# Altium PCB OT_LoRaWAN_Kit_02.PcbDoc
Units mm, origin at the board's own origin, x right, y up, seen from the top; angles counter-clockwise.
Board outline 53.4 x 48.3 mm, 2 copper layers (Top Layer, Bottom Layer); 41 components, 40 nets, 138 pads, 103 vias.
Unrouted connection lines stored in the file: 2.
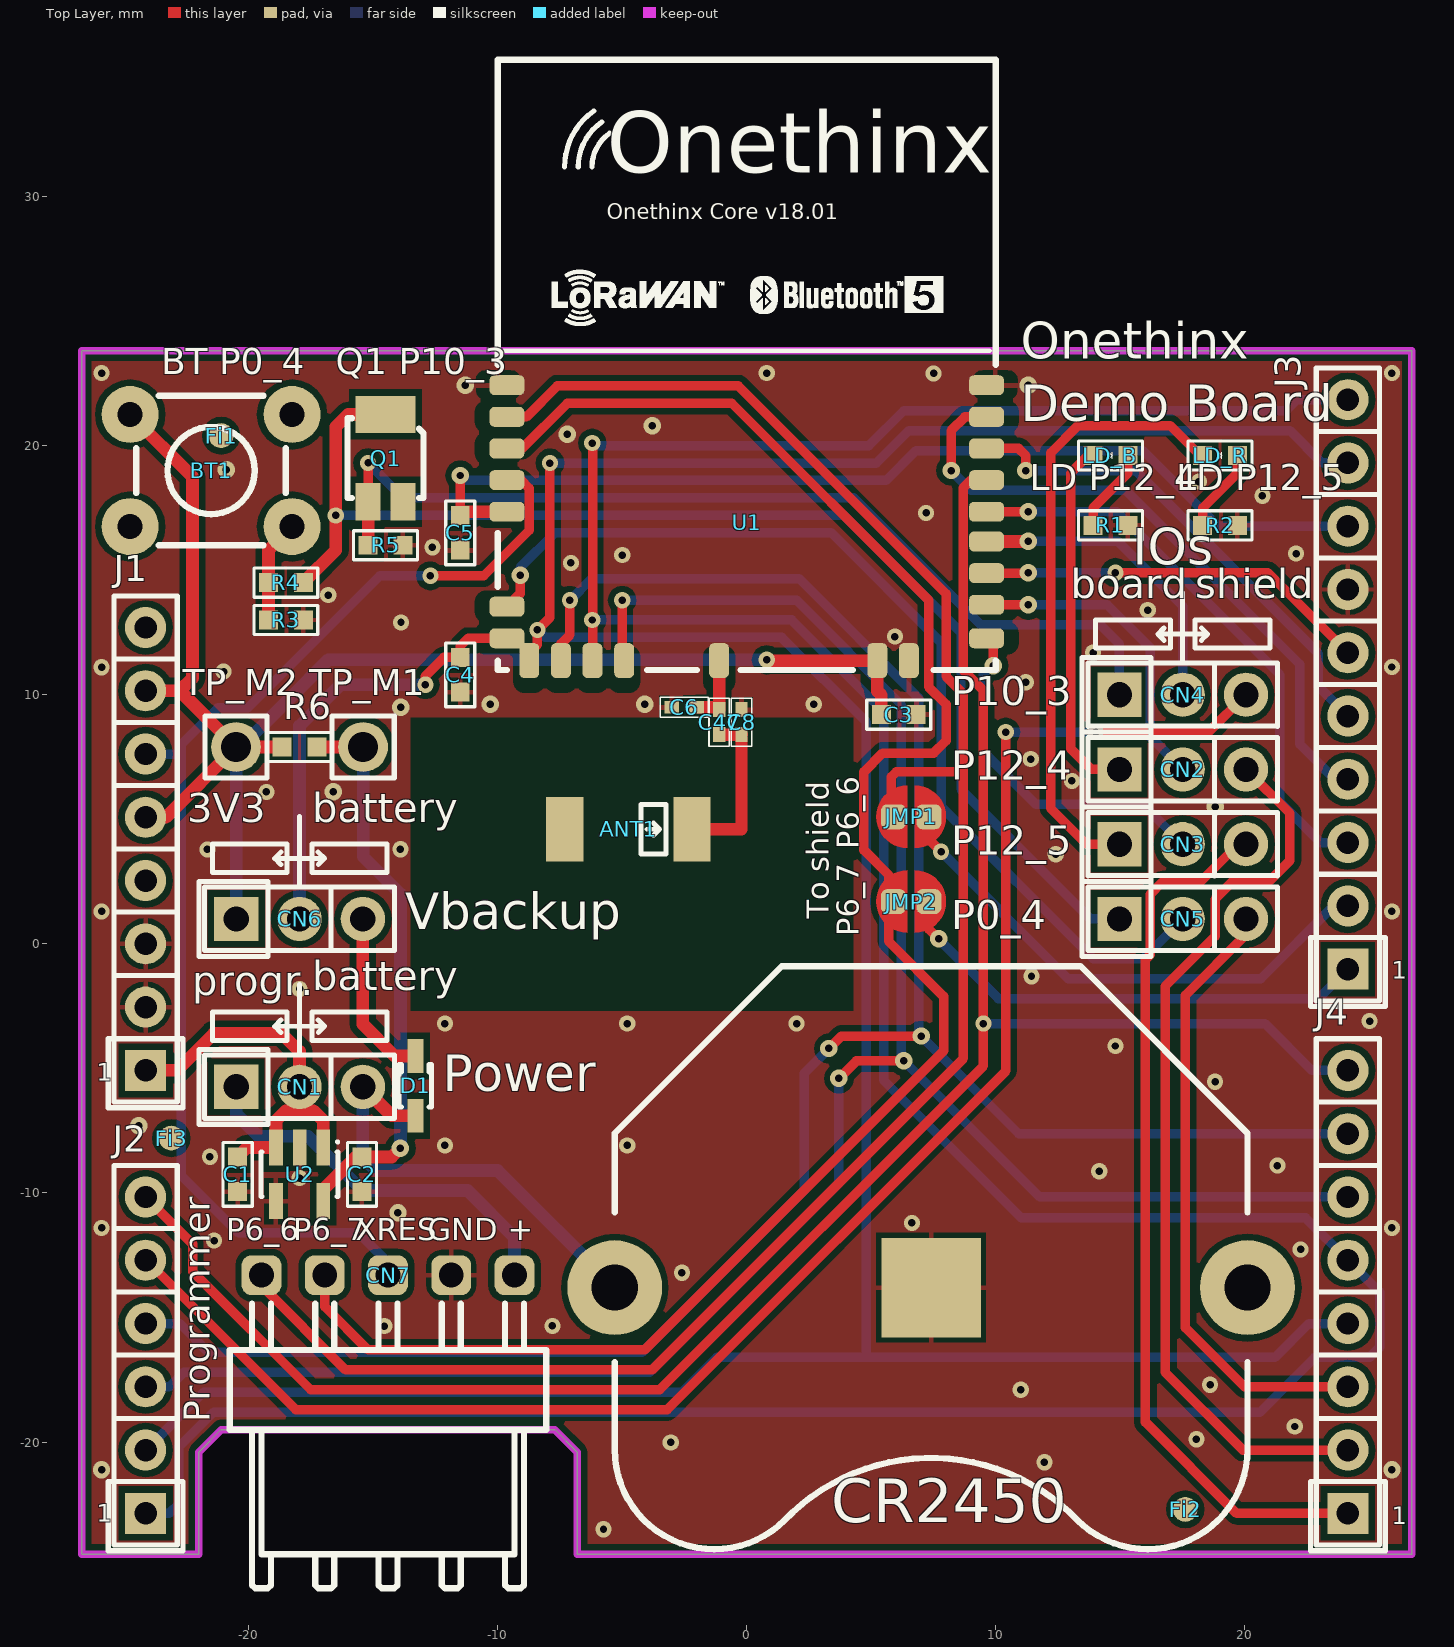
[diagram p0: Top Layer view]
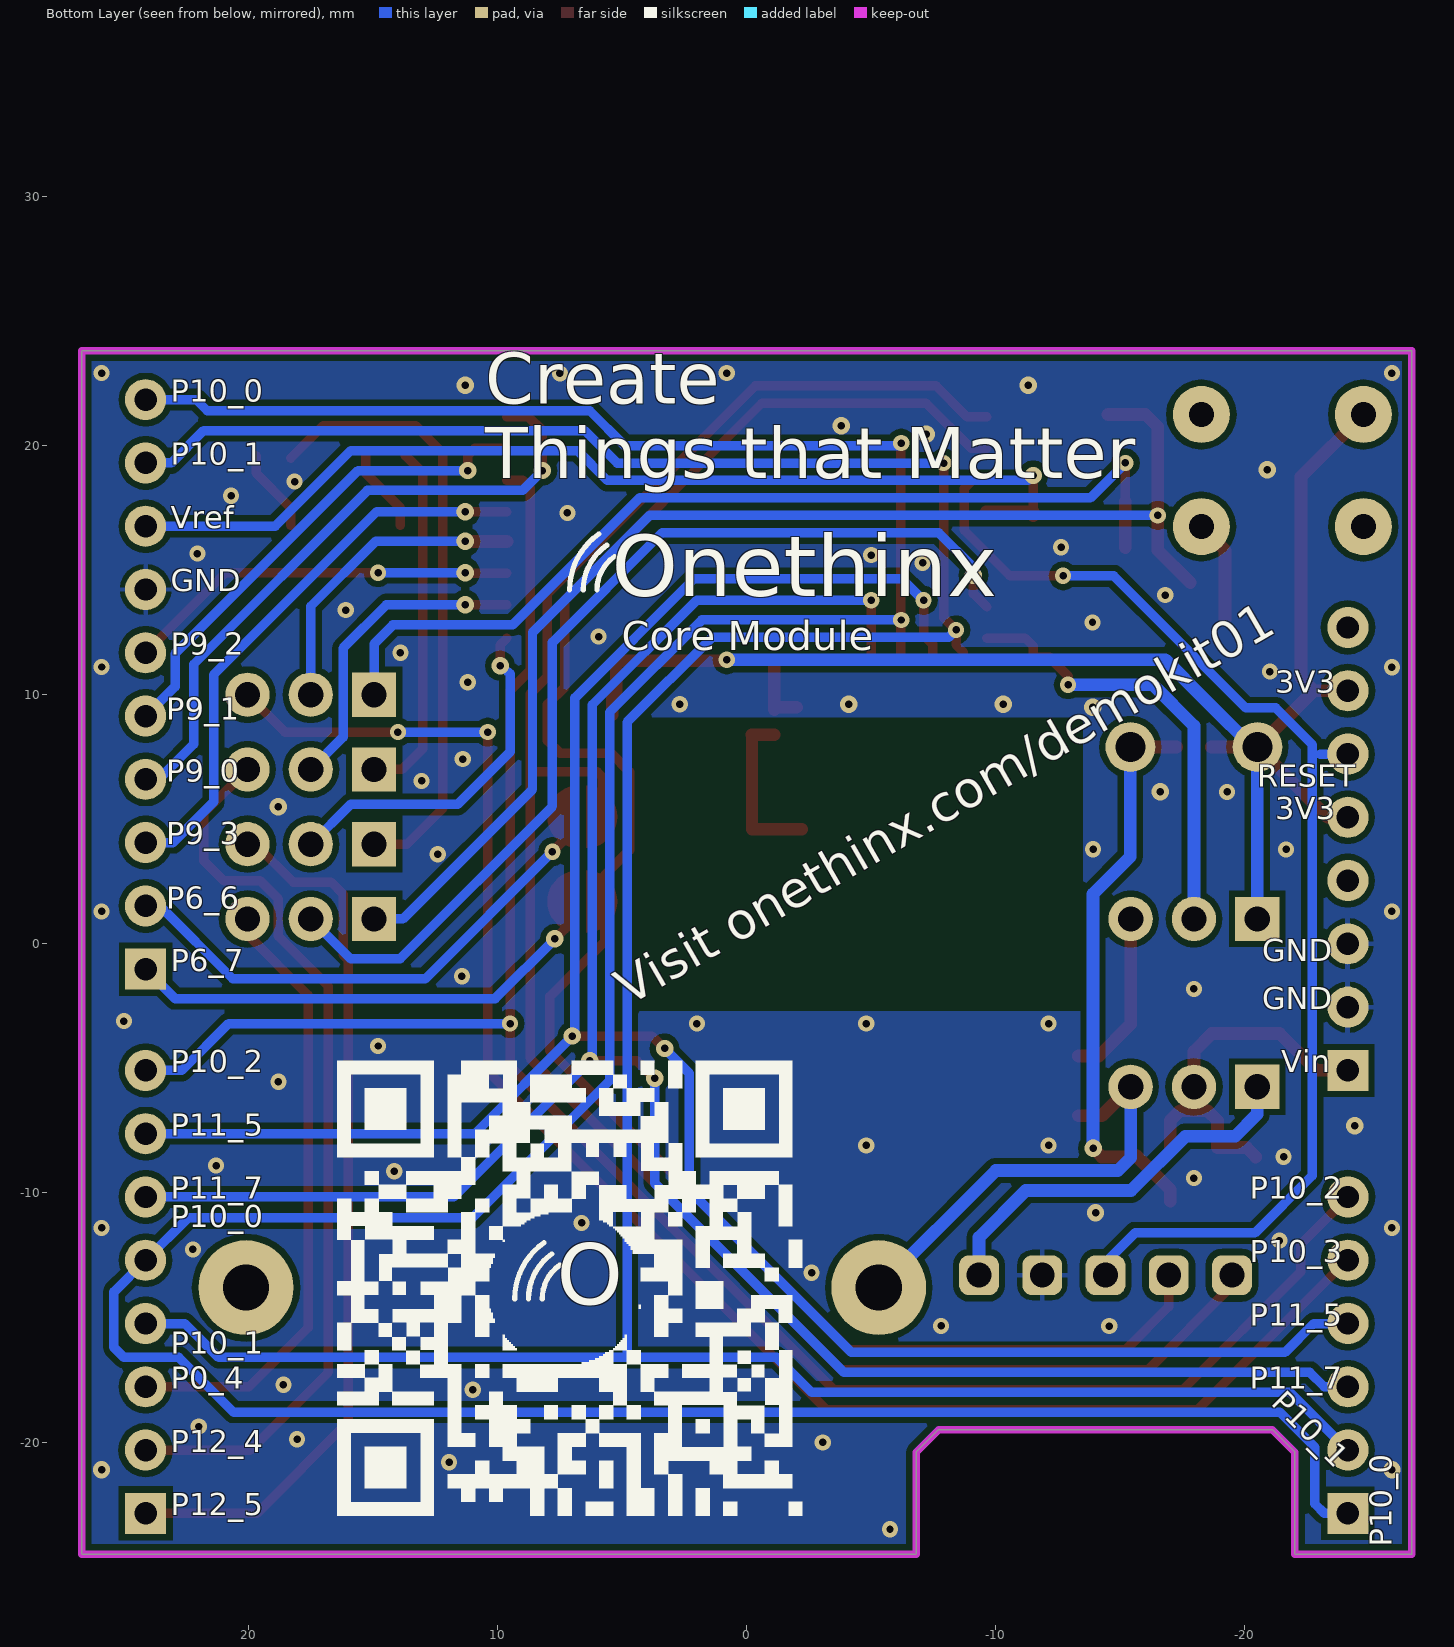
[diagram p1: Bottom Layer view, seen from below]

## Layer stack, top to bottom
Top Solder: solder mask 0.0102, Solder Resist, Dk 3.5
Top Layer: signal copper 0.0356
Dielectric 1: dielectric 0.32, FR-4, Dk 4.8
Bottom Layer: signal copper 0.0356
Bottom Solder: solder mask 0.0102, Solder Resist, Dk 3.5

## Board outline
-26.7,-24.5 -26.7,23.8 26.7,23.8 26.7,-24.5 -6.8,-24.5 -6.8,-20.4 -7.7,-19.5 -21.1,-19.5 -22,-20.4 -22,-24.5

## Design rules (kind name [scope] priority, off if disabled: settings)
BoardOutlineClearance [All] p1 off: gap=0.25 ignorepadtopadclearanceinfootprint=FALSE except(0: Arc-SplitContinuation Track-SplitContinuation SMDPad-SplitContinuation THPad-SplitContinuation Via-SplitContinuation Fill-SplitContinuation Poly-SplitContinuation Region-SplitContinuation Text-SplitContinuation)
Clearance [IsRegion] p1: gap=0.254 ignorepadtopadclearanceinfootprint=FALSE except(0: Arc-Hole Track-Hole SMDPad-Hole THPad-Hole Via-Hole Fill-Hole Poly-Hole Region-Hole Text-Hole)
Clearance Clearance-xPP-xTP-xTT [All] p2: gap=0.15 ignorepadtopadclearanceinfootprint=FALSE except(0: Arc-Hole Track-Hole SMDPad-Hole THPad-Hole Via-Hole Fill-Hole Poly-Hole Region-Hole Text-Hole)
ComponentClearance [All] p1 off: gap=0.25 collisioncheckmode=3 verticalgap=0.25 showdistances=FALSE
DiffPairsRouting [All] p1: maxlimit=0.25 minlimit=0.25 mostfreqgap=0.25 toplayer_minwidth=0.381 toplayer_maxwidth=0.381 toplayer_prefwidth=0.381 bottomlayer_minwidth=0.381 bottomlayer_maxwidth=0.381 bottomlayer_prefwidth=0.381 maxuncoupledlength=12.5
Height [All] p1: minheight=0 maxheight=25 prefheight=12.5
HoleSize HoleSize-PTH [All] p1: absolutevalues=TRUE maxlimit=2 minlimit=0.25 maxpercent=80.000 minpercent=20.000
HoleToHoleClearance [All] p1: gap=0.35 allowstackedmicrovias=TRUE
MinimumAnnularRing "Minimum IAR  >0.45mm" [((ObjectKind = 'Pad') OR (ObjectKind = 'Via')) And (Layer = 'MultiLayer') And (HoleDiameter > AsMM(0.45))] p1: minimumring=0.175 // minimum inner annular ring for pads > 0.45mm finished hole size
MinimumAnnularRing "Minimum IAR <=0.45mm" [((ObjectKind = 'Pad') OR (ObjectKind = 'Via')) And (Layer = 'MultiLayer') And (HoleDiameter <= AsMM(0.45))] p2: minimumring=0.175 // minimum inner annular ring for pads <= 0.45mm finished hole size
MinimumSolderMaskSliver [All] p1: minsoldermaskwidth=0.08
PlaneClearance PlaneClearance-IPI [All] p1: clearance=0.25
PlaneConnect [All] p1: planeconnectstyle=Relief reliefexpansion=0.175 reliefentries=4 reliefconductorwidth=0.2 reliefairgap=0.2
PolygonConnect [ISVIA OR InComponent('NT1')] p1: connectstyle=Direct reliefconductorwidth=0.254 reliefentries=4 polygonreliefangle="90 Angle" airgapwidth=0.254
PolygonConnect PolygonConnect-xTW [All] p2: connectstyle=Relief reliefconductorwidth=0.2 reliefentries=4 polygonreliefangle="90 Angle" airgapwidth=0.2
RoomDefinition OT_LoRaWAN_Kit_02 [InComponentClass('OT_LoRaWAN_Kit_02')] p1: confinementstyle=ConfineOut formatcopy=TRUE lockcomponents=FALSE outline 39,-23 45.5,-23 45.5,-17 39,-17
RoutingCorners [All] p1: cornerstyle=45-Degree minsetback=2.5 maxsetback=2.5
RoutingVias [All] p1: holewidth=0.3 width=0.65 viastyle="Through Hole" minholewidth=0.25 minwidth=0.6 maxholewidth=0.9 maxwidth=1.25
RoutingVias "RoutingVias > 0.45mm" [(ObjectKind = 'Via') And (HoleDiameter > AsMM(0.45))] p2 off: holewidth=0.5 width=0.85 viastyle="Through Hole" minholewidth=0.5 minwidth=0.85 maxholewidth=0.9 maxwidth=1.25 // finishet hole size > 0.45mm
RoutingVias "RoutingVias <= 0.45mm" [(ObjectKind = 'Via') And (HoleDiameter <= AsMM(0.45))] p3 off: holewidth=0.3 width=0.65 viastyle="Through Hole" minholewidth=0.25 minwidth=0.6 maxholewidth=0.45 maxwidth=0.8 // finishet hole size <= 0.45mm
SilkToSilkClearance [All] p1 off: silktosilkclearance=0.2
SilkToSolderMaskClearance SilkscreenOverComponentPads [IsPad] p1 off: minsilkscreentomaskgap=0.2 clearancetoexposedcopper=TRUE
SolderMaskExpansion [All] p1: expansion=0
Width Width-xTW [All] p1: maxlimit=1.5 minlimit=0.15 preferedwidth=0.2
19 further rules are at their usual default settings.

## Components (designator, comment, footprint, x,y, rotation, side; value= is the part's Value field where it differs from the comment)
ANT1 "ANT" "ANT FR05-S1-N-0-102" -4.75,4.6 r180 top
BT1 "BT P0_4" "BUTTON TACT6x6" -21.5,19 r90 top
C1 "1uF" 0603C-GENERIC -20.435,-9.25 r90 top
C2 "1uF" 0603C-GENERIC -15.448,-9.25 r90 top
C3 "100nF" 0603C-GENERIC 6.1,9.2 r180 top
C4 "100nF" 0603C-GENERIC -11.5,10.8 r90 top
C5 "100nF" 0603C-GENERIC -11.5,16.5 r90 top
C6 "1pF" 0402C-SMALL -2.51,9.5 r180 top
C8 "dnp" 0402C-SMALL -0.21,8.9 r90 top
C47 "1.5pF" 0402C-SMALL -1.11,8.9 r270 top
CN1 "CONNECTOR 1x3" HEADER-1X3 -20.49,-5.734 r90 top
CN2 "CONNECTOR 1x3" HEADER-1X3 14.96,7.006 r90 top
CN3 "CONNECTOR 1x3" HEADER-1X3 14.96,4.006 r90 top
CN4 "CONNECTOR 1x3" HEADER-1X3 14.96,10.006 r90 top
CN5 "CONNECTOR 1x3" HEADER-1X3 14.96,1.006 r90 top
CN6 "CONNECTOR 1x3" HEADER-1X3 -20.49,1.006 r90 top
CN7 "Programmer" "CON Molex 22053051" -14.4,-13.3 r0 top
CR2450 "BAT" "BATT_2450 clip - TH" 7.4,-13.8 r180 top locked
D1 "BAS16HT1G" SOD323 -13.3,-5.7 r90 top
Fi1 "FiducialTop" FiducialTop -21.1,20.4 r90 top
Fi2 "FiducialTop" FiducialTop 17.6,-22.7 r90 top
Fi3 "FiducialTop" FiducialTop -23.1,-7.8 r90 top
J1 "CONNECTOR 1x8" "SOCKET 2.54 1X8 TH" -24.13,-5.08 r180 top
J2 "CONNECTOR 1x6" "SOCKET 2.54 1X6 TH" -24.13,-22.86 r180 top
J3 "CONNECTOR 1x10" "SOCKET 2.54 1X10 TH" 24.13,-1.016 r180 top
J4 "CONNECTOR 1x8" "SOCKET 2.54 1X8 TH" 24.13,-22.86 r180 top
JMP1 "SWD to shield" "SOLDER JUMPER" 6.6,5.1 r180 top
JMP2 "SWD to shield" "SOLDER JUMPER" 6.6,1.7 r180 top
LD_B "LD P12_4" "LED SMD 0603 (1608)" 14.6,19.6 r180 top
LD_R "LD P12_5" "LED SMD 0603 (1608)" 19,19.6 r180 top
Q1 "Q1 P10_3" PLCC-3_CEB -14.5,19.5 r90 top
R1 "15K" 0603R-GENERIC 14.6,16.8 r180 top
R2 "10K" 0603R-GENERIC 19,16.8 r180 top
R3 "1M" 0603R-GENERIC -18.5,13 r180 top
R4 "1K" 0603R-GENERIC -18.5,14.5 r0 top
R5 "47K" 0603R-GENERIC -14.5,16 r180 top
R6 "0R" 0603R-GENERIC -17.95,7.9 r0 top
TP_M1 "TestPoint" "TestPoint 2mm" -15.4,7.9 r90 top
TP_M2 "TestPoint" "TestPoint 2mm" -20.5,7.9 r90 top
U1 "Onethinx Core V18.01" OnethinxCore_18_01 0,23.495 r0 top
U2 "TPS78330DDC" SOT-23-5 -17.948,-9.25 r180 top

## Footprints (in the part's own frame and the unit in brackets; to place one, negate y for a bottom-side part, rotate by r counter-clockwise, add the part's x,y. Pads: shape width x height; smd on the part's side, far side on the other; paste and mask are expansions set on the pad)
0402C-SMALL [mm] "CAPACITOR 0402 Small Land Pattern"
  rect 0.6x0.5 smd: 1(-0.5,0) 2(0.5,0)
  silkscreen extent -0.97,-0.41 0.97,0.41, body extent -0.51,-0.25 0.51,0.25, height 0.33
0603C-GENERIC [mil] "CAPACITOR 0603"
  rect 30x30 smd: 1(-27.56,0) 2(27.44,0)
  silkscreen extent -51,-23 50,23, body extent -32,-15 31,15, height 19
0603R-GENERIC [mil] "RESISTOR 0603"
  rect 30x30 smd: 1(-27.5,0) 2(27.5,0)
  silkscreen extent -50,-23 50,23, body extent -32,-15 32,15, height 19
"ANT FR05-S1-N-0-102" [mm] "Fractus FR05-S1-N-0-102 Compact Reach XtendTM (2.4 – 2.5 GHz)"
  rect 1.5x2.6 smd: ANT(-2.55,0) NC(2.55,0)
  silkscreen extent -1.5,-1 -0.5,1, body extent -3.5,-1.5 3.5,1.5, height 2.01
"BATT_2450 clip - TH" [mm] "Battery CR2450 clip"
  rect 4x4 smd paste+0: MINUS(0,0)
  round 3.81 hole 1.85: PLUS(-12.7,0) PLUS_1(12.7,0)
  silkscreen extent -12.7,-12.9 12.7,10.5
"BUTTON TACT6x6" [mm]
  round 2.286 hole 1: 1(-2.25,3.25) 2(2.25,3.25) 3(-2.25,-3.25) 4(2.25,-3.25)
  silkscreen extent -3,-3 3,3, body extent -3,-3.85 3,3.85, height 9.5
"CON Molex 22053051" [mm] "5 way 2.54mm RA TH"
  rrect50% 1.6x1.6 hole 1: 1(-5.08,0) 2(-2.54,0) 3(0,0) 4(2.54,0) 5(5.08,0)
  silkscreen extent -6.35,-12.57 6.35,-1.14
FiducialTop [mm]
  round 1 / inner round 0 / far side round 0 all layers, no hole: A(0,0)
HEADER-1X3 [mil]
  rect 70x70 hole 40: 1(-0.25,0)
  round 70 hole 40: 2(-0.25,-100) 3(-0.25,-200)
  silkscreen extent -59,-250 59,59, body extent -50,-250 50,50, height 354
"LED SMD 0603 (1608)" [mil] "LED 0603"
  rect 30x30 smd: A(27.5,0) K(-27.5,0)
  silkscreen extent -50,-23 50,23, body extent -30,-15 30,15, height 43
OnethinxCore_18_01 [mm] "Onethinx LoRaWAN Core V18.01"
  rrect50% 1.4x0.8 smd: 1(-9.625,-1.07) 2(-9.625,-2.34) 3(-9.625,-3.61) 4(-9.625,-4.88) 5(-9.625,-6.15) 6(-9.625,-9.96) 7(-9.625,-11.23) 15(9.625,-11.23) 16(9.625,-9.882) 17(9.625,-8.612) 18(9.625,-7.342) 19(9.625,-6.15) 20(9.625,-4.88) 21(9.625,-3.61) 22(9.625,-2.34) 23(9.625,-1.07)
  rrect50% 0.8x1.4 smd: 8(-8.73,-12.125) 9(-7.46,-12.125) 10(-6.19,-12.125) 11(-4.92,-12.125) 12(-1.11,-12.125) 13(5.24,-12.125) 14(6.51,-12.125)
  silkscreen extent -10,-12.5 10,12, body extent -8.5,-11 8.5,10.54, height 1.7
PLCC-3_CEB [mm]
  rect 1.5x1 smd: B(-1.75,-0.7) E(-1.75,0.7)
  rect 1.5x2.4 smd: C(1.75,0)
  silkscreen extent -1.6,-1.53 1.6,1.53, body extent -1.75,-1.4 1.75,1.4, height 1.95
"SOCKET 2.54 1X6 TH" [mil]
  rect 65x65 hole 35.43: 1(0,0)
  round 65 hole 35.43: 2(0,-100) 3(0,-200) 4(0,-300) 5(0,-400) 6(0,-500)
  silkscreen extent -59,-550 59,59, body extent -50,-550 50,50, height 295
"SOCKET 2.54 1X8 TH" [mil]
  rect 65x65 hole 35.43: 1(0,0)
  round 65 hole 35.43: 2(0,-100) 3(0,-200) 4(0,-300) 5(0,-400) 6(0,-500) 7(0,-600) 8(0,-700)
  silkscreen extent -59,-750 59,59, body extent -50,-750 50,50, height 295
"SOCKET 2.54 1X10 TH" [mil]
  rect 65x65 hole 35.43: 1(0,0)
  round 65 hole 35.43: 2(0,-100) 3(0,-200) 4(0,-300) 5(0,-400) 6(0,-500) 7(0,-600) 8(0,-700) 9(0,-800) 10(0,-900)
  silkscreen extent -59,-950 59,59, body extent -50,-950 50,50, height 295
SOD323 [mm]
  rect 1.35x0.65 smd: A(-1.2,0) K(1.2,0)
  silkscreen extent -0.85,-0.65 0.85,0.65, body extent -1.25,-0.63 1.25,0.63, height 0.9
"SOLDER JUMPER" [mm] "Solder Jumper 2mm"
  rrect50% 1x1 smd paste-10 mask+0: A(-0.711,0) B(0.711,0)
  Top Layer region: 0.152,-1.25 0.152,1.25 0.629,1.155 1.032,0.885 1.302,0.482 1.397,0.005 1.397,0.005 1.397,-0.005 1.302,-0.482 1.032,-0.885 0.629,-1.155 0.152,-1.25
  Top Layer region: -0.152,1.25 -0.152,-1.25 -0.629,-1.155 -1.032,-0.885 -1.302,-0.482 -1.397,-0.005 -1.397,-0.005 -1.397,0.005 -1.302,0.482 -1.032,0.885 -0.629,1.155 -0.152,1.25
SOT-23-5 [mm]
  rect 0.55x1.45 smd: 1(-0.95,-1.075) 2(0,-1.075) 3(0.95,-1.075) 4(0.95,1.075) 5(-0.95,1.075)
  silkscreen extent -1.58,-1.35 1.55,0.9, body extent -1.45,-1.4 1.45,1.4, height 1.09
"TestPoint 2mm" [mm] "Test Point 2mm"
  round 2 hole 1.2: 1(0,0)
  silkscreen extent -1.25,-1.25 1.25,1.25

## Part data
ANT1: "Antenna Fractus FR05-S1-N-0-102"
BT1: library part SW-TACT, "FSM4JH"
C1 C2 C3 C4 C5 C6 C8 C47: library part CAP, "Capacitor"
CN1 CN2 CN3 CN4 CN5 CN6: "Harwin M20-9990345"
CN7: library part "CONNECTOR 1x5", "CON Molex 22053051"
CR2450: "Battery"
D1: library part Diode, "Diode"
Fi1 Fi2 Fi3: "Fiducial Marker 1mm for Pick n Place"
JMP1: library part SolderJumper
JMP2: library part SolderJumper, "Solder Jumper"
LD_B: library part LED, "Wurth 150060BS73220"
LD_R: library part LED, "Wurth 150060RS75000"
Q1: library part Phototransistor, "Phototransistor Vishay VEMT4700-GS08"
R1 R2 R3 R4 R5 R6: library part RES, "Resistor"
TP_M1 TP_M2: "Test Point"
U1: library part Onethinx_Core_18_01, "PSoC Mixed Signal Array"
U2: library part "Voltage Regulator_EN_ADJ"

## Via types
v1: diameter 0.65, hole 0.3, Top Layer to Bottom Layer, tented both sides, 74 vias
v2: diameter 0.7, hole 0.3, Top Layer to Bottom Layer, tented both sides, 29 vias

## Nets (pads, with @x,y where several pads share a name; then routed paths per layer and width w, separated by ;. In a path a pad name is that pad's centre, name@x,y a point inside that pad or via, vN(x,y) a via of type N, cw(c..) or ccw(c..) an arc to the next point about the centre after c; other vN are vias at no path point)
3V3: BT1.2 BT1.4 C3.2 CN6.1 J1.5 J1.7 R6.1 TP_M2.1 U1.13 | length 60.1
  Top Layer w0.508: BT1.2 -22.25,18.75 -22.25,10.67 -22.76,10.16 ; J1.5 -23.32,5.08 TP_M2.1 ; J1.7 -22.76,10.16 ; CN6.1 CN6.1@-20.285,1 ; R6.1 TP_M2.1 ; v1@0.832,11.37 U1.13 5.24,10.147 5.403,9.984 C3.2 ; -22.76,10.16 TP_M2.1
  Bottom Layer w0.508: CN6.1 -20.49,8.01 -20.042,8.457 -19.743,8.457 -19.148,9.053 -18.4,9.8 -16.798,11.402 v1(0.8,11.402)
"BUTTON / L_POWER": CN5.1 Q1.C R4.2 | length 50.9
  Top Layer w0.508: R4.2 -16.495,15.806 v1(-16.495,17.2) -16.495,20.745 -16.5,20.75 -16,21.25 Q1.C
  Bottom Layer w0.381: v1(-16.495,17.2) 3.9,17.2 8.6,12.5 8.6,6.2 13.8,1 CN5.1
GND: C1.1 C2.1 C3.1 C4.1 C5.1 C6.2 C8.2 CN7.4 CR2450.MINUS J1.2 J1.3 J3.7 R1.1 R2.1 R3.1 R5.1 U1.1 U1.14 U1.23 U2.2 U2.4
  other v1: -5.75,-23.5 11.95,-20.81 -3.05,-20.01 18.05,-19.883 22,-19.373 11,-17.9 18.6,-17.7 -14.55,-15.344 -7.8,-15.334 -2.6,-13.2 22.23,-12.266 -21.382,-11.91 -25.9,-11.4 25.9,-11.4 6.629,-11.2 -17.95,-9.4 14.15,-9.129 21.3,-8.9 -21.55,-8.547 -12.116,-8.091 -4.8,-8.091 18.8,-5.533 14.8,-4.1 -12.116,-3.2 -4.8,-3.2 2,-3.2 25,-3.1 -17.948,-1.809 11.431,-1.3 -25.9,1.3 25.9,1.3 12.4,3.6 -21.65,3.79 -13.9,3.8 -19.278,6.1 13.05,6.541 11.4,7.419 2.69,9.616 11.2,10.5 -21,10.93 -25.9,11.103 25.9,11.114 13.9,11.684 5.95,12.334 -13.879,12.9 16.1,13.4 -16.797,14 -7.061,15.29 -5,15.603 22.05,15.665 -12.617,15.917 7.2,17.3 20.697,17.99 18.15,18.555 7.5,22.896 -25.9,22.913 0.8,22.913 25.9,22.913
  other v2: -25.9,-21.105 25.9,-21.105 -14,-10.8 -24.412,-7.3 18.8,5.5 -16.6,6.1 -13.887,9.5 -10.3,9.616 -4.095,9.616 -20.9,19.036 -7.2,20.453 -3.8,20.8 -11.3,22.425 11.3,22.425
LED_B: CN2.1 LD_B.A | length 14.4
  Top Layer w0.381: LD_B.A@13.701,19.6 13,18.898 13,7.84 13.84,7 CN2.1
LED_R: CN3.1 LD_R.A | length 24.7
  Top Layer w0.381: CN3.1 13.64,4 12.2,5.44 12.2,19.707 13.293,20.8 17.002,20.8 LD_R.A@18.302,19.5
LIGHT: CN4.1 Q1.E R5.2 | length 38.6
  Top Layer w0.381: Q1.E v1(-15.2,19.304)
  Top Layer w0.508: Q1.E -15.2,16.002 R5.2 R5.2@-15.198,15.902
  Bottom Layer w0.381: v1(-15.2,19.304) -13.796,17.9 4.3,17.9 9.4,12.8 14.202,12.8 14.96,12.042 CN4.1
NetANT1_ANT: ANT1.ANT C8.1 C47.2 | length 6.7
  Top Layer w0.5: ANT1.ANT -0.21,4.6 C8.1
  Top Layer w0.508: C47.2 C8.1
NetBT1_1: BT1.1 BT1.3 R3.2 R4.1 | length 4.1
  Top Layer w0.508: R3.2 R4.1 -19.199,15.801 BT1.3
NetC2_2: C2.2 R6.2 TP_M1.1 U2.5 | length 22.7
  Top Layer w0.508: R6.2 TP_M1.1 ; U2.5 -16.998,-9.866 C2.2@-15.616,-8.484 ; C2.2 -14.253,-8.553 v2(-13.9,-8.2)
  Bottom Layer w0.508: TP_M1.1 -15.4,3.5 -13.9,2 v2(-13.9,-8.2)
NetC6_1: C6.1 C47.1 U1.12 | length 2.9
  Top Layer w0.5: C6.1 -1.11,9.5 U1.12
  Top Layer w0.508: C47.1 C47.1@-1.11,9.5
NetCN6_3: CN6.3 D1.K | length 6.9
  Top Layer w0.508: CN6.3 -15.41,-3.226 -14.136,-4.5 D1.K
NetJ3_1: J3.1 JMP2.A | length 19.6
  Top Layer w0.381: JMP2.A 7.311,0.589 v2(7.7,0.2)
  Bottom Layer w0.381: v2(7.7,0.2) 10.1,-2.2 22.946,-2.2 J3.1
NetJ3_2: J3.2 JMP1.A | length 21.3
  Top Layer w0.381: JMP1.A 7.311,4.189 v1(7.8,3.7)
  Bottom Layer w0.381: v1(7.8,3.7) 12.9,-1.4 20.63,-1.4 23.554,1.524 J3.2
NetLD_B_K: LD_B.K R1.2 | length 3.4
  Top Layer w0.381: R1.2 13.901,17.501 15.298,18.898 LD_B.K
NetLD_R_K: LD_R.K R2.2 | length 3.4
  Top Layer w0.381: R2.2 18.302,17.502 19.699,18.899 LD_R.K
P9_0: J3.4 U1.22 | length 26.2
  Top Layer w0.381: v2(8.2,19) 8.2,20.6 8.755,21.155 U1.22
  Bottom Layer w0.381: v2(8.2,19) 9,18.2 15.224,18.2 22.2,11.224 22.2,8.02 23.616,6.604 J3.4
P9_1: J3.5 U1.21 | length 20.1
  Top Layer w0.381: U1.21 10.915,19.885 11.2,19.6 v2(11.2,19)
  Bottom Layer w0.381: v2(11.2,19) 15.6,19 22.946,11.654 22.946,10.328 J3.5
P9_2: J3.6 U1.17 | length 15.8
  Top Layer w0.381: U1.17 11.282,14.883 v2(11.3,14.9) ; v1(14.8,14.9) 20.914,14.9 J3.6
  Bottom Layer w0.381: v2(11.3,14.9) v1(14.8,14.9)
P9_3: J3.3 U1.19 | length 23
  Top Layer w0.381: U1.19 v2(11.3,17.345)
  Bottom Layer w0.381: v2(11.3,17.345) 14.855,17.345 21.4,10.8 21.4,5.7 23.036,4.064 J3.3
P10_0: J2.1 J3.10 J4.5 U1.10 | length 147.1
  Top Layer w0.381: U1.10 v1@-6.19,20.1
  Bottom Layer w0.381: J2.1 -23.187,-22.86 -22.8,-22.473 -22.8,-20.2 -21.4,-18.8 20.6,-18.8 22.8,-16.6 25,-16.6 25.4,-16.2 25.4,-13.97 J4.5 22.43,-11 11.018,-11 5.5,-5.482 5.5,9.3 1.8,13 v1(-6.2,13) ; v1@-6.2,20 4.9,20 6.3,21.4 21.653,21.4 22.097,21.844 J3.10
  other v1: -6.2,20.1
P10_1: J2.2 J3.9 J4.4 U1.8 | length 132
  Top Layer w0.381: U1.8 -8.7,11.4 -8.7,11.704 -8.4,12.004 v1(-8.4,12.6) -7.9,13.1 v1(-7.9,19.3)
  Bottom Layer w0.381: J2.2 -24.12,-20.32 -21.8,-18 -2.6,-18 -1.2,-16.6 21.2,-16.6 22.56,-15.24 J4.4 ; v1(-8.4,12.6) -8.1,12.3 1.4,12.3 4.8,8.9 4.8,-16.6 ; v1(-7.9,19.3) 5.2,19.3 6.5,20.6 21.8,20.6 23.096,19.304 J3.9
P10_2: J2.6 J4.8 U1.20 | length 82.9
  Top Layer w0.381: J2.6 -22.245,-12.045 -22.245,-13.155 -17.5,-17.9 -3.5,-17.9 9.5,-4.9 v1(9.5,-3.2) 9.5,10.176 8.7,10.976 8.7,18.315 9,18.615 U1.20
  Bottom Layer w0.381: v1(9.5,-3.2) 20.8,-3.2 22.68,-5.08 J4.8
P10_3: CN4.2 U1.18 | length 12.5
  Top Layer w0.508: U1.18 v2(11.3,16.153)
  Bottom Layer w0.381: v2(11.3,16.153) 14.9,16.153 17.5,13.553 CN4.2
P11_5: J2.4 J4.7 U1.9 | length 90.9
  Top Layer w0.381: U1.9 -7.46,12.04 -7.1,12.4 v1(-7.1,13.789) ; v2(3.3,-4.2) 3.8,-3.7 v2(7,-3.7)
  Bottom Layer w0.381: J2.4 -22.76,-15.24 -21.6,-16.4 -4.2,-16.4 2.3,-9.9 2.3,-5.2 v2(3.3,-4.2) ; v1(-7.1,13.789) -6.224,14.664 2.11,14.664 6.9,9.874 v2@6.9,-3.7 ; v2(7,-3.7) 10.92,-7.62 J4.7
P11_7: J2.3 J4.6 U1.11 | length 88.1
  Top Layer w0.381: v1(-5,13.789) -5,11.49 -4.9,11.39 U1.11 ; v2(3.7,-5.4) 4.4,-4.7 v2(6.3,-4.7)
  Bottom Layer w0.381: J2.3 -23.18,-17.78 -22.6,-17.2 -3.9,-17.2 3.7,-9.6 v2(3.7,-5.4) ; v1(-5,13.789) 2.011,13.789 6.2,9.6 6.2,-4.6 v2(6.3,-4.7) 11.76,-10.16 J4.6
P12_4: CN2.2 U1.16 | length 12.7
  Top Layer w0.381: U1.16 v2(11.3,13.613)
  Bottom Layer w0.381: v2(11.3,13.613) 14.462,13.613 16.2,11.874 16.2,8.3 CN2.2
P12_5: CN3.2 U1.15 | length 13.8
  Top Layer w0.381: U1.15 9.9,11.99 v2@9.9,11.382
  Bottom Layer w0.381: 9.59,10.924 9.5,10.834 9.5,7.704 11.604,5.6 15.9,5.6 CN3.2
  other v2: 9.9,11.166
SH_P10_3: CN4.3 J2.5 | length 66.5
  Top Layer w0.381: J2.5 -24.1,-12.7 -18.1,-18.7 -3.2,-18.7 10.4,-5.1 v1(10.4,8.5) ; v1(14,8.5) 18.54,8.5 CN4.3
  Bottom Layer w0.381: v1(10.4,8.5) v1(14,8.5)
SH_P12_4: CN2.3 J4.2 | length 36.5
  Top Layer w0.381: CN2.3 21.8,5.24 21.8,3.34 21,2.54 19.54,2.54 18.8,1.8 18.8,0.305 16.8,-1.695 16.8,-17.2 19.92,-20.32 J4.2
SH_P12_5: CN3.3 J4.1 | length 35.6
  Top Layer w0.381: CN3.3 19.728,4 18.2,2.472 16.675,2.472 16.2,1.997 16.2,-0.433 16,-0.633 16,-19.2 19.66,-22.86 J4.1
SH_WU_P0_4: CN5.3 J4.3 | length 24.9
  Top Layer w0.381: CN5.3 20.04,0.373 17.6,-2.067 17.6,-15.4 19.98,-17.78 J4.3
SWD_CLK_P6_7: CN7.2 JMP2.B U1.3 | length 75
  Top Layer w0.381: CN7.2 -16.94,-14.56 -15.2,-16.3 -4.1,-16.3 7.902,-4.298 7.902,-2.106 5.7,0.095 5.7,2.763 4.7,3.763 4.7,6.9 5.456,7.656 7.502,7.656 8,8.154 8,9.617 7.3,10.317 7.3,13.8 -0.6,21.7 -7.2,21.7 -9.015,19.885 U1.3
SWD_IO_P6_6: CN7.1 JMP1.B U1.2 | length 80.3
  Top Layer w0.381: CN7.1 -19.48,-13.72 -16.1,-17.1 -3.8,-17.1 8.7,-4.6 8.7,6.9 ; U1.2 -8.845,21.155 -7.6,22.4 -0.348,22.4 8,14.052 8,10.735 8.7,10.035 8.7,6.9 ; JMP1.B@5.8,5.1 5.8,6.7 6,6.9 8.7,6.9
Vbackup: C4.2 CN6.2 U1.7 | length 18
  Top Layer w0.381: v1(-12.9,10.4) -12.9,10.751 -12.154,11.497 C4.2 -11.5,11.952 -11.187,12.265 U1.7
  Bottom Layer w0.508: CN6.2 -17.95,8.75 -16.3,10.4 v1(-12.9,10.4)
Vbatt: CN1.3 CR2450.PLUS_1 D1.A | length 17.7
  Top Layer w0.508: CN1.3 -14.25,-6.9 D1.A
  Bottom Layer w0.508: CN1.3 -15.41,-8.588 -14.898,-9.1 -10,-9.1 CR2450.PLUS_1
Vin: C1.2 CN1.2 J1.1 U2.1 U2.3 | length 15.6
  Top Layer w0.508: J1.1 -22.872,-5.08 -21.392,-3.6 ; -21.4,-3.6 -21.392,-3.6 ; C1.2 -20.057,-8.175 U2.3 -18.898,-7.098 -18.5,-6.7 -17.9,-6.7 ; U2.1 -16.998,-7.098 -17.397,-6.7 -17.9,-6.7 ; -21.392,-3.6 -18.667,-3.6 -17.95,-4.317 CN1.2 -17.95,-6.65 -17.9,-6.7
Vprog: CN1.1 CN7.5 | length 15.8
  Bottom Layer w0.508: CN1.1 -20.49,-6.835 -19.6,-7.725 -17.6,-7.725 -15.425,-9.9 -11.2,-9.9 -9.32,-11.78 CN7.5
Vref: C5.2 J3.8 U1.5 | length 41.2
  Top Layer w0.381: C5.2 -11.5,17.345 v2(-11.5,18.8)
  Top Layer w0.508: C5.2 C5.2@-11.352,17.345 ; C5.2@-11.5,17.345 C5.2@-11.352,17.345 ; U1.5 C5.2@-11.352,17.345
  Bottom Layer w0.381: v2(-11.5,18.8) -11.3,18.6 5.6,18.6 6.8,19.8 15.898,19.8 18.934,16.764 J3.8
WAKEUP_P0_4: CN5.2 U1.6 | length 40.6
  Top Layer w0.381: U1.6 -9.1,14.06 v2(-9.1,14.8)
  Bottom Layer w0.381: v2(-9.1,14.8) -9.1,15.1 -7.7,16.5 3.4,16.5 7.8,12.1 7.8,5.516 13.916,-0.6 15.9,-0.6 CN5.2
XRES: CN7.3 J1.6 U1.4 | length 48.9
  Top Layer w0.381: v1(-12.7,14.774) -10.558,14.774 -8.73,16.602 -8.73,18.28 -9.065,18.615 U1.4
  Bottom Layer w0.381: J1.6 -23.02,7.62 ; CN7.3 -14.4,-12.785 -15.585,-11.6 -20.4,-11.6 -22.7,-9.3 -22.7,8 -21.232,9.468 -20.032,9.468 -14.726,14.774 v1(-12.7,14.774)
pads on no net: ANT1.NC CR2450.PLUS Fi1.A Fi2.A Fi3.A J1.4 J1.8 Q1.B

## Polygon pours and split planes (outlines as drawn)
GND on Top Layer "Top Layer-GND" (solid, pour order 0): -26.4,23.5 -26.4,-24.2 -21.4,-24.2 -21.4,-19.2 -7.4,-19.2 -7.4,-24.2 26.4,-24.2 26.4,9.1 4.3,9.1 4.3,-2.7 -13.5,-2.7 -13.5,9.1 26.4,9.1 26.4,23.5
GND on Bottom Layer "Bottom Layer-GND" (solid, pour order 6): -26.4,23.5 -26.4,-24.2 -21.4,-24.2 -21.4,-19.2 -7.4,-19.2 -7.4,-24.2 26.4,-24.2 26.4,9.1 4.3,9.1 4.3,-2.7 -13.5,-2.7 -13.5,9.1 26.4,9.1 26.4,23.5

## Keep-outs
Keep-Out Layer:
  the board outline again, w0.3

## Silkscreen, mask and mechanical layers (free items; w line width, h text height)
Top Overlay:
  lines w0.2: -18.951,-3.308 -18.701,-3.058 ; -18.951,-3.307 -18.701,-3.557 ; -18.951,3.432 -18.701,3.682 ; -18.951,3.432 -18.701,3.182 ; -18.95,-3.307 -16.95,-3.307 -16.95,-3.306 -17.2,-3.556 ; -18.95,3.432 -16.95,3.432 -16.95,3.434 -17.2,3.184 ; -17.95,-4.464 -17.95,-1.627 ; -17.95,2.276 -17.95,5.112 ; -17.201,-3.057 -16.951,-3.307 ; -17.201,3.682 -16.951,3.432 ; 16.749,12.182 16.499,12.432 ; 16.749,12.682 16.499,12.432 ; 17.5,14.112 17.5,11.276 ; 18.249,12.682 18.499,12.432 ; 18.25,12.184 18.5,12.434 18.5,12.432 16.5,12.432 ; -21.45,-3.87 -18.45,-3.87 -18.45,-2.74 -21.45,-2.74 -21.45,-3.87 ; -21.45,2.87 -18.45,2.87 -18.45,4 -21.45,4 -21.45,2.87 ; -17.45,-3.87 -14.45,-3.87 -14.45,-2.74 -17.45,-2.74 -17.45,-3.87 ; -17.45,2.87 -14.45,2.87 -14.45,4 -17.45,4 -17.45,2.87 ; 14,11.87 14,13 17,13 17,11.87 14,11.87 ; 18,11.87 18,13 21,13 21,11.87 18,11.87
  text "Onethinx / Demo Board" at 11,20.5 h2.5
  text "IOs" at 15.5,14.745 h2.5
  text "board" at 13,13.5 h2
  text "shield" at 18,13.5 h2
  text "P10_3" at 8.2,9.2 h2
  text "P12_4" at 8.2,6.2 h2
  text "3V3" at -22.45,4.5 h2
  text "battery" at -17.45,4.5 h2
  text "P6_6" at 4.8,3.8 h1.52 r90
  text "P12_5" at 8.2,3.2 h2
  text "To shield" at 3.6,1 h1.52 r90
  text "P6_7" at 4.8,0.3 h1.52 r90
  text "P0_4" at 8.2,0.2 h2
  text "Vbackup" at -13.7,0.1 h2.5
  text "battery" at -17.45,-2.24 h2
  text "progr." at -22.25,-2.44 h2
  text "Power" at -12.2,-6.4 h2.5
  text "P6_6" at -20.9,-12.2 h1.52
  text "P6_7" at -18.2,-12.2 h1.52
  text "XRES" at -15.7,-12.2 h1.52
  text "GND" at -12.8,-12.2 h1.52
  text "+" at -9.6,-12.2 h1.52
Bottom Overlay:
  drawing of 40 lines, arcs and shapes, not listed
  text "P10_0" at 23.114,21.463 h1.52
  text "Create" at 10.5,21 h3.5
  text "P10_1" at 23.114,18.923 h1.52
  text "Things that Matter" at 10.5,18 h3.5
  text "Vref" at 23.114,16.383 h1.52
  text "GND" at 23.114,13.843 h1.52
  text "Onethinx" at 5.424,13.137 h4.25
  text "Core Module" at 5.02,11.402 h2
  text "P9_2" at 23.114,11.3 h1.52
  text "3V3" at -21.209,9.779 h1.52
  text "P9_1" at 23.3,8.7 h1.52
  text "P9_0" at 23.3,6.2 h1.52
  text "RESET" at -20.5,6 h1.52
  text "3V3" at -21.209,4.699 h1.52
  text "P9_3" at 23.3,3.7 h1.52
  text "P6_6" at 23.3,1.1 h1.52
  text "GND" at -20.701,-1 h1.52
  text "P6_7" at 23.114,-1.397 h1.52
  text "GND" at -20.701,-2.921 h1.52
  text "Visit onethinx.com/demokit01" at 4.5,-2.921 h2.5 r330
  text "Vin" at -21.463,-5.461 h1.52
  text "P10_2" at 23.114,-5.461 h1.52
  text "P11_5" at 23.114,-8.001 h1.52
  text "P10_2" at -20.193,-10.541 h1.52
  text "P11_7" at 23.114,-10.541 h1.52
  text "P10_0" at 23.114,-11.684 h1.52
  text "P10_3" at -20.193,-13.081 h1.52
  text "O" at 7.625,-15.312 h4.25
  text "P11_5" at -20.193,-15.621 h1.52
  text "P10_1" at 23.114,-16.764 h1.52
  text "P11_7" at -20.193,-18.161 h1.52
  text "P0_4" at 23.114,-18.161 h1.52
  text "P10_1" at -20.8,-18.687 h1.52 r45
  text "P12_4" at 23.114,-20.701 h1.52
  text "P12_5" at 23.114,-23.241 h1.52
  text "P10_0" at -26.2,-24.2 h1.52 r270

## Text inside footprints (layer, text, board x,y; h text height)
J1: Top Overlay "1" at -26.1,-5.5 h0.7
J2: Top Overlay "1" at -26.1,-23.2 h0.7
J3: Top Overlay "1" at 25.9,-1.4 h0.7
J4: Top Overlay "1" at 25.9,-23.3 h0.7
U1: Top Overlay "Onethinx Core v18.01" at -5.625,28.87 h1.06; Top Overlay "Onethinx" at -5.625,30.12 h4.25